# EAGLE board HEX3_leg_board_PCB_v3.2 (EAGLE 9.7.0)
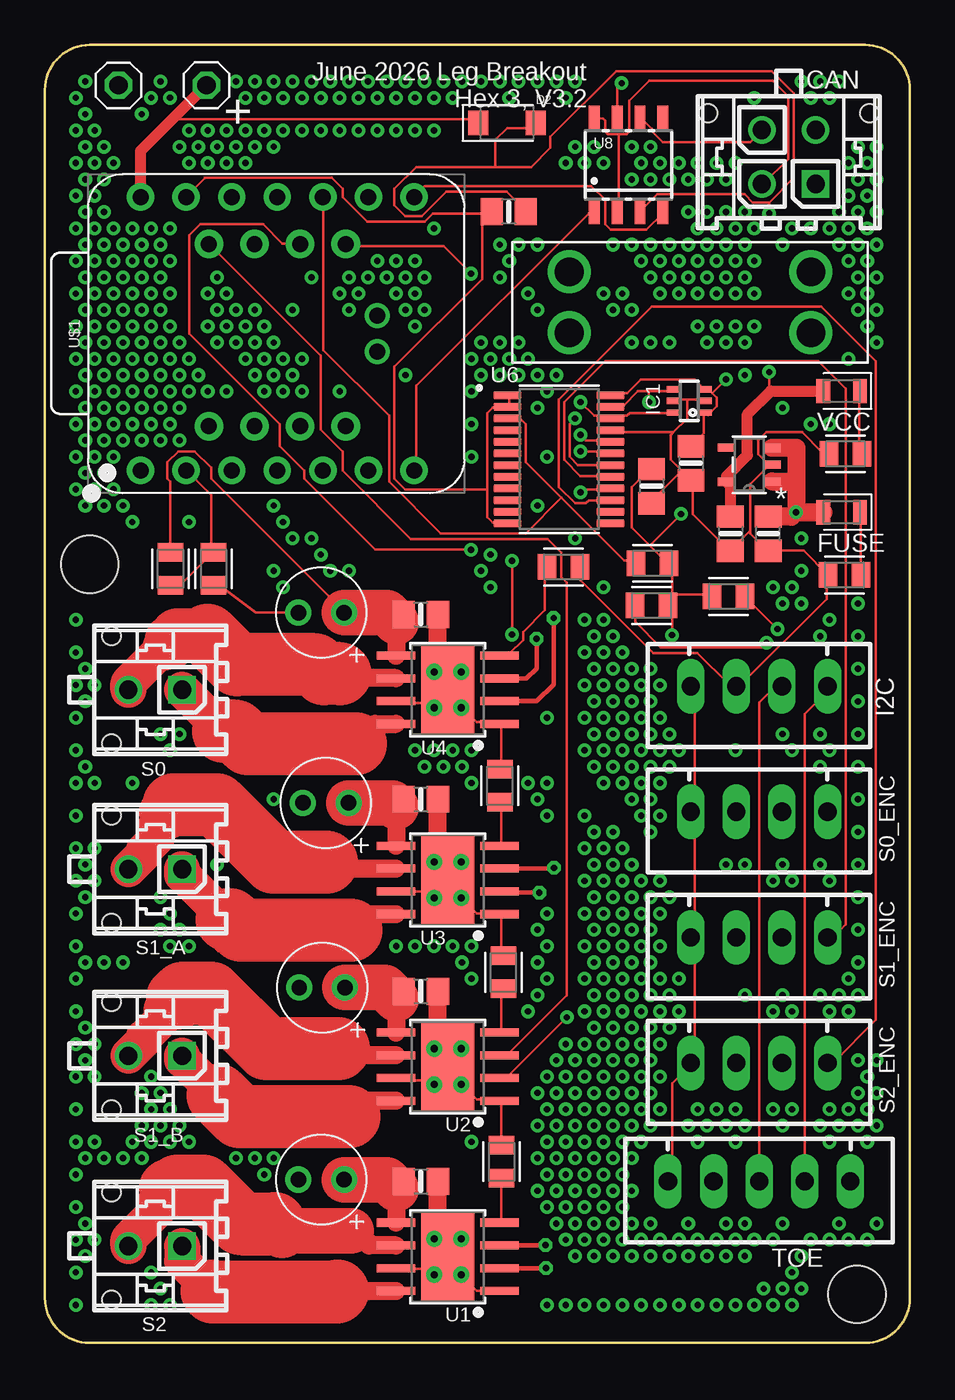
[diagram p0: board, top side]
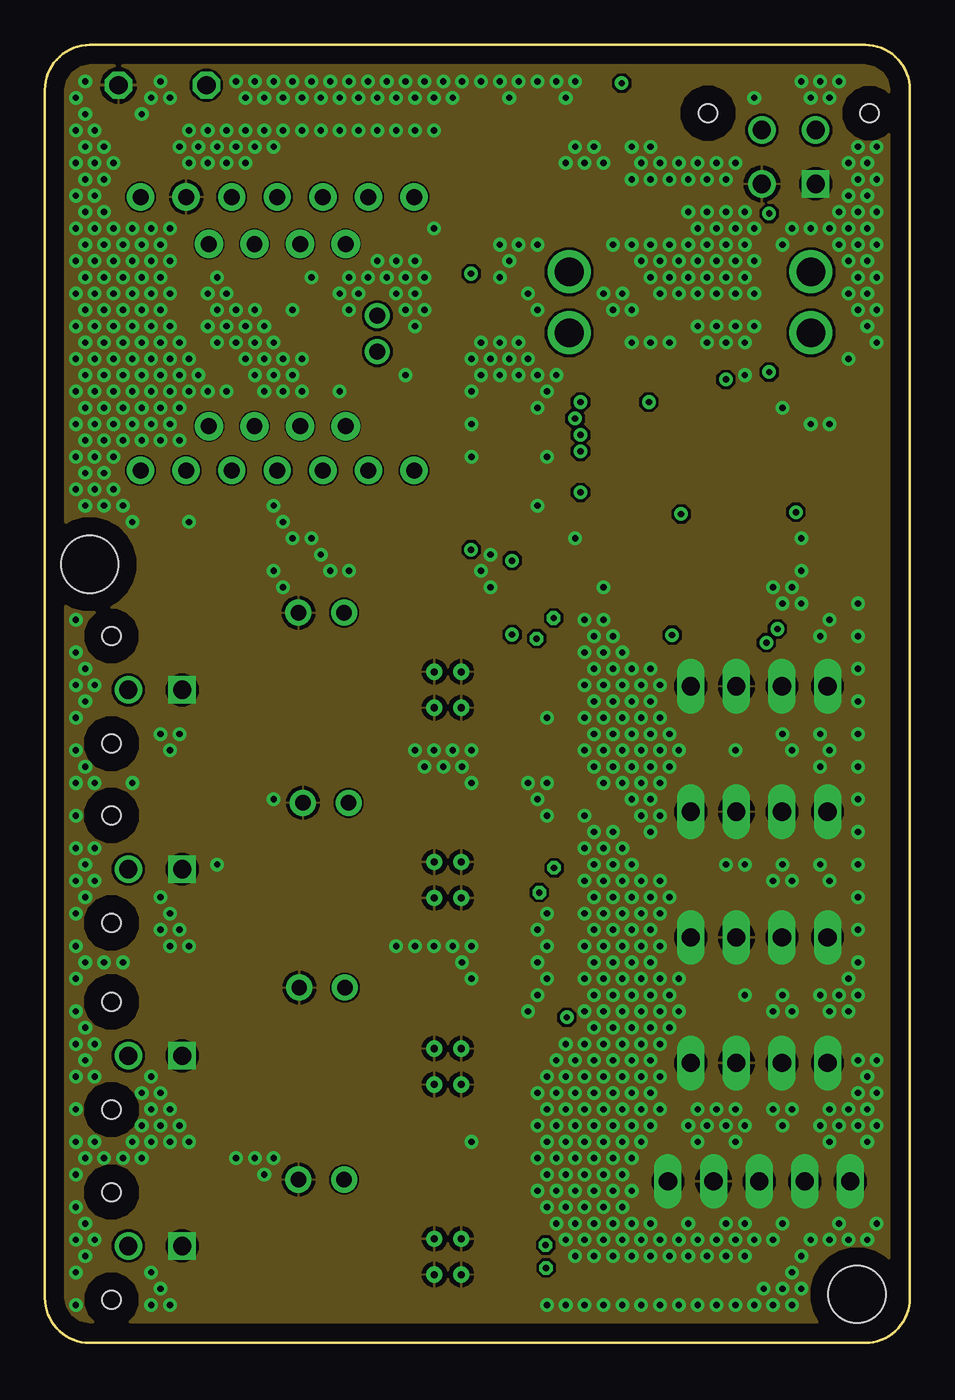
[diagram p1: board, inner layer Route2]
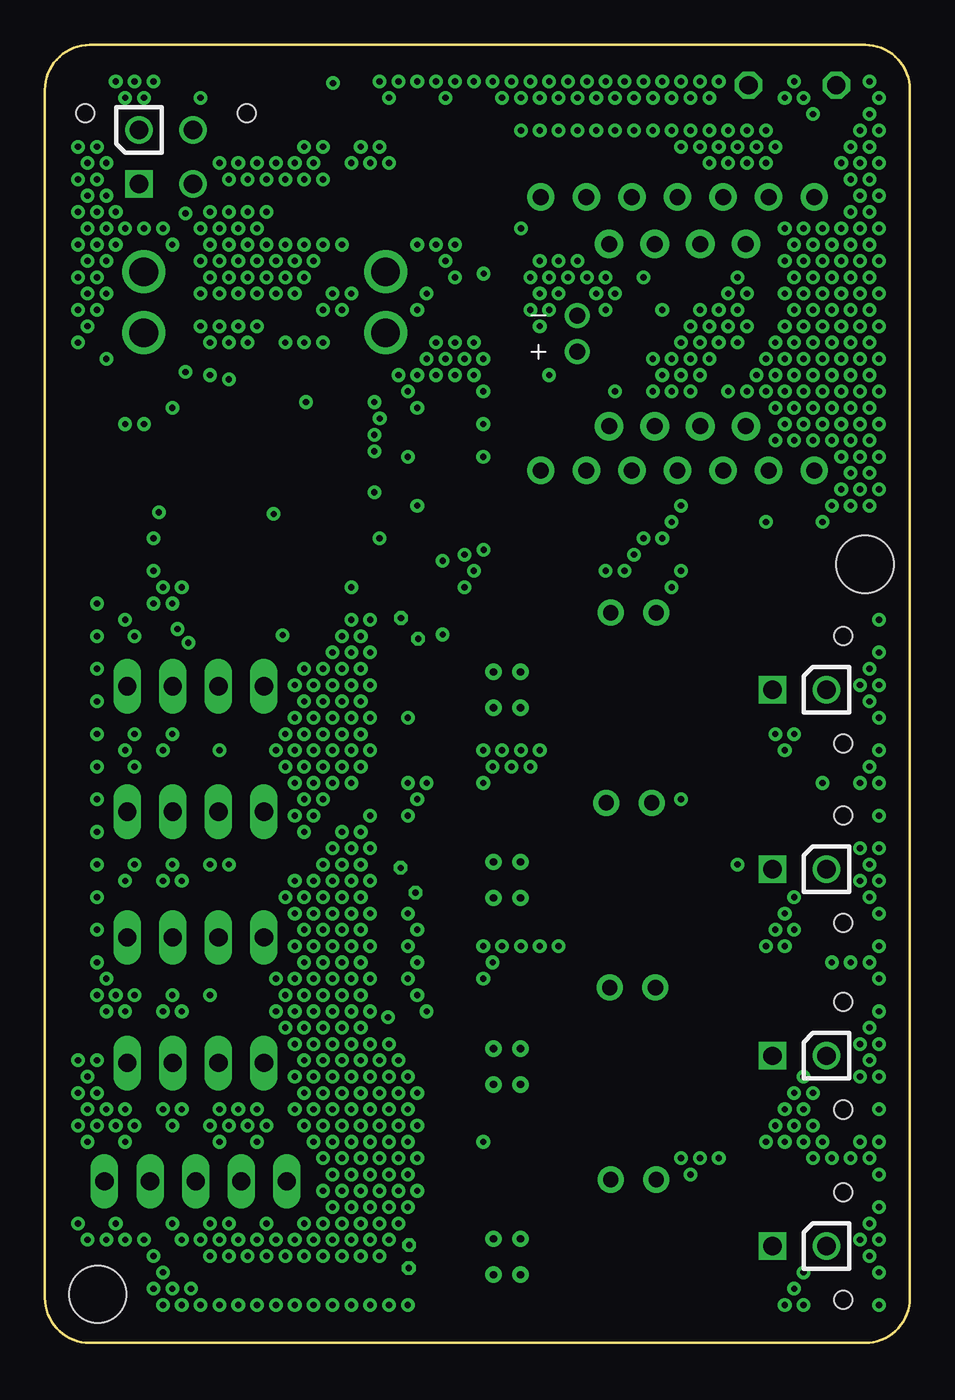
[diagram p2: board, bottom side, seen from below]

Size 48.2 x 72.35 mm. Coordinates in mm from the lower left corner, seen from the top.
Outline: 0,69.85 0,2.5 arc90 2.5,0 45.7,0 arc90 48.2,2.5 48.2,69.85 arc90 45.7,72.35 2.5,72.35 arc90 0,69.85
Copper layers (1+2*63+64): Top / Route2 / layer 63 / layer 64
Stack-up 4 Layer Stack: Top SilkScreen Epoxy Ink / Top SolderMask SR:Green 0.0254mm Dk 4.3 / Top Surface Finish Lead-Free 0.02mm / Top CuFoil:007 0.035mm / Dielectric-1 Prepreg:001 0.064mm / Dielectric-2 Prepreg:001 0.064mm / Route2 CuFoil:007 0.035mm / Dielectric-3 Core:066 0.711mm / Route63 CuFoil:007 0.035mm / Dielectric-4 Prepreg:001 0.064mm / Dielectric-5 Prepreg:001 0.064mm / Bottom CuFoil:007 0.035mm / Bottom Surface Finish Lead-Free 0.02mm / Bottom SolderMask SR:Green 0.0254mm Dk 4.3 / Bottom SilkScreen Epoxy Ink
Design rules: minimum copper width 6mil, minimum drill size 0.35mm, copper clearance wire_polygon to wire_polygon 6mil, copper clearance wire_polygon to pad_smd 6mil, copper clearance wire_polygon to via 6mil, copper clearance pad_smd to pad_smd 6mil, copper clearance pad_smd to via 0.5mm, copper clearance via to via 0.15mm, copper clearance smd to pad (same net) 6mil, copper clearance smd to via (same net) 6mil, copper clearance smd to smd (same net) 6mil, dimension clearance 40mil, via restrict clearance 0mil, restrict clearance 0mil, drill distance 6mil, keepout clearance 0mil
Holes 3.2 mm at 45.25,2.7 2.5,43.4

## Footprints (pad centres in the part's own frame; a part is rotated, then mirrored left to right if it is on the bottom)
0805-NO = smd 1.24 x 1.5: 1 -0.95,0; 2 0.95,0
CAPPRD254W65D500H1150B = drill 0.85 pad 1.45: 1 -1.27,0; 2 1.27,0
1X01 = drill 1.016 octagon: 1 0,0
SODFL3718X115 = smd 1.115 x 1.361: 1 -1.6,0; 2 1.6,0
JST-XH-04-PACKAGE-LONG-PAD = drill 1.016 long: 1 -3.81,0; 2 -1.27,0; 3 1.27,0; 4 3.81,0
FUSE_3557-2 = drill 1.6: 1_1 -6.735,1.7; 1_2 -6.735,-1.7; 2_1 6.735,1.7; 2_2 6.735,-1.7
LEDC2012X110N_FLAT-R = smd 0.762 x 1.362: A 1.025,0; C -1.025,0
SC70-6L = smd 0.35 x 0.8: 1 -0.65,-0.85; 2 0,-0.85; 3 0.65,-0.85; 4 0.65,0.85; 5 0,0.85; 6 -0.65,0.85
43045-0412 = drill 1.02 square: P$1 1.5,0 | drill 1.02: P$2 -1.5,0; P$3 1.5,3; P$4 -1.5,3 | hole 1.02: 4.5,3.94; -4.5,3.94
RESC2012X65 = smd 1.031 x 1.42: 1 -0.919,0; 2 0.919,0
43045-0212 = drill 1.02 square: P$1 0,0 | drill 1.02: P$2 0,3 | hole 1.02: 3,3.94; -3,3.94
JST-XH-05-PACKAGE-LONG-PAD = drill 1.016 long: 1 -5.08,0; 2 -2.54,0; 3 0,0; 4 2.54,0; 5 5.08,0
HSOP8 = smd 0.45 x 2.15: 1 -1.905,-2.875; 2 -0.635,-2.875; 3 0.635,-2.875; 4 1.905,-2.875; 5 1.905,2.875; 6 0.635,2.875; 7 -0.635,2.875; 8 -1.905,2.875 | smd 4.9 x 2.95: GND 0,0 | drill 0.4: P$1 -1,0.75; P$2 -1,-0.75; P$3 1,-0.75; P$4 1,0.75
TSOT23-5_ONS = smd 0.953 x 0.457: 1 -1.276,0.94; 2 -1.276,0; 3 -1.276,-0.94; 4 1.276,-0.953; 5 1.276,0.953
SOP65P640X120-24N = smd 1.57 x 0.41: 1 -2.87,3.575; 2 -2.87,2.925; 3 -2.87,2.275; 4 -2.87,1.625; 5 -2.87,0.975; 6 -2.87,0.325; 7 -2.87,-0.325; 8 -2.87,-0.975; 9 -2.87,-1.625; 10 -2.87,-2.275; 11 -2.87,-2.925; 12 -2.87,-3.575; 13 2.87,-3.575; 14 2.87,-2.925; 15 2.87,-2.275; 16 2.87,-1.625; 17 2.87,-0.975; 18 2.87,-0.325; 19 2.87,0.325; 20 2.87,0.975; 21 2.87,1.625; 22 2.87,2.275; 23 2.87,2.925; 24 2.87,3.575
SOT96-1 = smd 0.6 x 1.3: 1 -1.905,-2.65; 2 -0.635,-2.65; 3 0.635,-2.65; 4 1.905,-2.65; 5 1.905,2.65; 6 0.635,2.65; 7 -0.635,2.65; 8 -1.905,2.65
XIAO-RP2350-DIP = drill 0.889 pad 1.524: 1_2 7.62,7.62; 2_2 5.08,7.62; 3_2 2.54,7.62; 4_2 0,7.62; 5_2 -2.54,7.62; 6_2 -5.08,7.62; 7_2 -7.62,7.62; 8_1 -7.62,-7.62; 9_1 -5.08,-7.62; 10_1 -2.54,-7.62; 11_1 0,-7.62; 12_1 2.54,-7.62; 13_1 5.08,-7.62; 14_1 7.62,-7.62 | drill 0.889 pad 1.6: 15_1 3.81,-5.001; 16_1 1.27,-5.001; 17_1 -1.27,-5.001; 18_1 -3.81,-5.001; 19_3 -3.81,5.159; 20_3 -1.27,5.159; 21_3 1.27,5.159; 22_3 3.81,5.159 | drill 0.889 pad 1.1: 23_3 -5.575,1; 24_3 -5.575,-1
LEDC2012X110N_FLAT-B = smd 0.762 x 1.362: A 1.025,0; C -1.025,0

## Placement (x,y rotation side)
C1  0.1uF/50V  [0805-NO]  20.95,19.6 0 top
C2  22uF/50V  [CAPPRD254W65D500H1150B]  15.45,19.8 180 top
C3  0.1uF/50V  [0805-NO]  20.95,30.3 0 top
C4  22uF/50V  [CAPPRD254W65D500H1150B]  15.65,30.1 180 top
C5  0.1uF/50V  [0805-NO]  20.95,40.6 0 top
C6  22uF/50V  [CAPPRD254W65D500H1150B]  15.4,40.7 180 top
C7  0.1uF/50V  [0805-NO]  20.95,9 0 top
C9  1uF  [0805-NO]  38.2,45.1 270 top
C10  1uF  [0805-NO]  40.3,45.1 90 top
C12  10uF  [0805-NO]  33.8,47.75 270 top
C13  0.1uF  [0805-NO]  25.85,63.05 180 top
C14  0.01uF  [0805-NO]  36,49.03 270 top
C15  22uF/50V  [CAPPRD254W65D500H1150B]  15.4,9.1 180 top
CAP_5V_DIODE  PINHD-1X1  [1X01]  9,70.1 0 top
CAP_GND  PINHD-1X1  [1X01]  4.1,70.1 0 top
D2  ZENER  [SODFL3718X115]  25.75,68 0 top
EXTRA  JST-XH-04-PIN-LONG-PAD  [JST-XH-04-PACKAGE-LONG-PAD]  39.8,36.6 180 top
F1  3557-2  [FUSE_3557-2]  35.95,58 0 top
FUSE  LED_RED  [LEDC2012X110N_FLAT-R]  44.4,46.3 180 top
IC1  LTC4311_SC70  [SC70-6L]  35.9,52.5 90 top
IN  [43045-0412]  41.45,64.6 0 top
R1  1.5K  [RESC2012X65]  44.55,42.8 180 top
R2  470  [RESC2012X65]  44.6,49.55 180 top
R3  62K  [RESC2012X65]  7,43.15 90 top
R4  10K  [RESC2012X65]  9.4,43.15 90 top
R5  10K  [RESC2012X65]  33.85,43.45 180 top
R6  10K  [RESC2012X65]  38.1,41.6 0 top
R7  22K  [RESC2012X65]  25.45,10.1 270 top
R8  22K  [RESC2012X65]  25.35,31.05 270 top
R9  22K  [RESC2012X65]  28.9,43.25 180 top
R10  22K  [RESC2012X65]  25.55,20.65 270 top
R11  10K  [RESC2012X65]  33.8,41.1 180 top
S0_ENC  JST-XH-04-PIN-LONG-PAD  [JST-XH-04-PACKAGE-LONG-PAD]  39.8,29.6 180 top
S1  [43045-0212]  7.65,5.4 90 top
S1_ENC  JST-XH-04-PIN-LONG-PAD  [JST-XH-04-PACKAGE-LONG-PAD]  39.8,22.6 180 top
S2_A  [43045-0212]  7.65,16 90 top
S2_B  [43045-0212]  7.65,26.4 90 top
S2_ENC  JST-XH-04-PIN-LONG-PAD  [JST-XH-04-PACKAGE-LONG-PAD]  39.8,15.6 180 top
S3  [43045-0212]  7.65,36.4 90 top
TOE  JST-XH-05-PIN-LONG-PAD  [JST-XH-05-PACKAGE-LONG-PAD]  39.8,9 180 top
U1  DRV8871  [HSOP8]  22.45,4.8 90 top
U2  DRV8871  [HSOP8]  22.45,15.4 90 top
U3  DRV8871  [HSOP8]  22.45,25.8 90 top
U4  DRV8871  [HSOP8]  22.45,36.4 90 top
U5  NCP718ASN500T1GTSOT23-5_ONS  [TSOT23-5_ONS]  39.25,48.95 180 top
U6  TCA9548APWR  [SOP65P640X120-24N]  28.65,49.25 0 top
U8  TJA1050  [SOT96-1]  32.52,65.66 0 top
U$1  XIAO-RP2350-DIPXIAO-RP2350-DIP  [XIAO-RP2350-DIP]  12.95,56.25 180 top
VCC  LED_BLUE  [LEDC2012X110N_FLAT-B]  44.39,53.05 180 top

## Library data of the parts
C1 C3 C5 C7 C9 C10 C12-C14 IC1 U1-U4 = microbuilder
C2 C4 C6 C15 = Tinkercad
CAP_5V_DIODE CAP_GND = Connector; CATEGORY: Headers; DESCRIPTION: Header-Straight-1 Position; PACKAGE_TYPE: THT; PITCH: 0.100" (2.54mm); SUBCATEGORY: Headers-Male Pins; TYPE: Board to Board or Cable-Unshrouded-Through Hole-Straight
D2 = Tinkercad; CATEGORY: Diode; SUB-CATEGORY: Zener
EXTRA S0_ENC S1_ENC S2_ENC TOE = Rembrandt Electronics - JST XH Connectors v1-0
F1 = Mini Blade Fuse 3557-2; AVAILABILITY: In Stock; CHECK_PRICES: https://www.snapeda.com/parts/3557-2/Keystone/view-part/?ref=eda; DESCRIPTION: THM 2 in 1 Auto Blade Holder; MF: Keystone Electronics; MP: 3557-2; PACKAGE: Nonstandard Keystone; PRICE: None; SNAPEDA_LINK: https://www.snapeda.com/parts/3557-2/Keystone/view-part/?ref=snap
FUSE = LED; CATEGORY: LED; COLOR: RED; DESCRIPTION: CHIP LED FLAT; SUB-CATEGORY: CHIP; TYPE: FLAT_TOP
IN S1 S2_A S2_B S3 = Molex Connectors
R1-R11 = Resistor; CATEGORY: Resistors; DESCRIPTION: Chip Resistor 2.00 X 1.25 X 0.65 mm body 0805(2012-METRIC) Package; PACKAGE_SIZE: 0805; PACKAGE_TYPE: SMD
U5 = NCP718ASN500T1G Voltage Regulator; COPYRIGHT: Copyright (C) 2025 Ultra Librarian. All rights reserved.; MANUFACTURER_NAME: onsemi; MANUFACTURER_PART_NUMBER: NCP718ASN500T1G
U6 = TCA9548APWR I2C MUX; AVAILABILITY: In Stock; CHECK_PRICES: https://www.snapeda.com/parts/TCA9548APWR/Texas+Instruments/view-part/?ref=eda; DESCRIPTION: 8-channel 1.65- to 5.5-V I2C/SMBus switch with reset & voltage translation; MF: Texas Instruments; MP: TCA9548APWR; PACKAGE: TSSOP-24 Texas Instruments; PRICE: None; SNAPEDA_LINK: https://www.snapeda.com/parts/TCA9548APWR/Texas+Instruments/view-part/?ref=snap
U8 = TJA1050; AVAILABILITY: In Stock; CHECK_PRICES: https://www.snapeda.com/parts/TJA1050/NXP+Semiconductors/view-part/?ref=eda; DESCRIPTION: CAN 1MBd Silent 5V Automotive 8-Pin SO T/R; MF: NXP Semiconductors; MP: TJA1050; PACKAGE: None; PRICE: None; SNAPEDA_LINK: https://www.snapeda.com/parts/TJA1050/NXP+Semiconductors/view-part/?ref=snap
U$1 = XIAO-RP2350-DIP
VCC = LED; CATEGORY: LED; COLOR: BLUE; DESCRIPTION: CHIP LED FLAT; SUB-CATEGORY: CHIP; TYPE: FLAT_TOP

## Nets
3.3V: C12.1 C14.1 EXTRA.4 IC1.1 IC1.3 R5.1 R6.1 R11.1 S0_ENC.4 S1_ENC.4 S2_ENC.4 TOE.5 U6.24 U$1.12_1
5V: C9.1 C13.1 D2.2 U5.5 U8.3 VCC.A
5V_DIODE: CAP_5V_DIODE.1 D2.1 U$1.14_1
24V: F1.1_1 F1.1_2 IN.P$1
24V_FUSE: C1.1 C2.1 C3.1 C4.1 C5.1 C6.1 C7.1 C10.2 C15.1 F1.2_1 F1.2_2 FUSE.A R3.2 U1.5 U2.5 U3.5 U4.5 U5.1 U5.3
CAN_RX: U8.4 U$1.8_1
CAN_TX: U8.1 U$1.7_2
CANH: IN.P$3 U8.7
CANL: IN.P$4 U8.6
GND: C1.2 C2.2 C3.2 C4.2 C5.2 C6.2 C7.2 C9.2 C10.1 C12.2 C13.2 C14.2 C15.2 CAP_GND.1 EXTRA.3 IC1.2 IC1.5 IN.P$2 R1.2 R2.2 R4.1 R7.1 R8.1 R9.1 R10.1 S0_ENC.3 S1_ENC.3 S2_ENC.3 TOE.4 U1.1 U1.7 U1.GND U1.P$1 U1.P$2 U1.P$3 U1.P$4 U2.1 U2.7 U2.GND U2.P$1 U2.P$2 U2.P$3 U2.P$4 U3.1 U3.7 U3.GND U3.P$1 U3.P$2 U3.P$3 U3.P$4 U4.1 U4.7 U4.GND U4.P$1 U4.P$2 U4.P$3 U4.P$4 U5.2 U6.1 U6.2 U6.12 U6.21 U8.2 U8.8 U$1.13_1
MUX_RESET: R5.2 U6.3 U$1.10_1
MUX_SCL: EXTRA.2 IC1.6 R11.2 TOE.3 U6.22 U$1.17_1
MUX_SDA: EXTRA.1 IC1.4 R6.2 TOE.2 U6.23 U$1.18_1
N$1: R7.2 U1.4
N$2: R10.2 U2.4
N$3: R8.2 U3.4
N$4: R9.2 U4.4
N$6: FUSE.C R1.1
N$8: R2.1 VCC.C
N$9: R3.1 R4.2 U$1.2_2
OUT1: S1.P$2 U1.6
OUT2: S1.P$1 U1.8
OUT3: S2_A.P$1 U2.8
OUT4: S2_A.P$2 U2.6
OUT5: S2_B.P$1 U3.8
OUT6: S2_B.P$2 U3.6
OUT7: S3.P$1 U4.8
OUT8: S3.P$2 U4.6
S0_A: U4.3 U$1.9_1
S0_B: U4.2 U$1.11_1
S0_SCL: S0_ENC.2 U6.20
S0_SDA: S0_ENC.1 U6.19
S1_SCL: S1_ENC.2 U6.18
S1_SDA: S1_ENC.1 U6.17
S1A_A: U2.3 U$1.15_1
S1A_B: U2.2 U$1.16_1
S1B_A: U3.3 U$1.19_3
S1B_B: U3.2 U$1.20_3
S2_A: U1.3 U$1.21_3
S2_B: U1.2 U$1.22_3
S2_SCL: S2_ENC.2 U6.16
S2_SDA: S2_ENC.1 U6.15
TOE_GPIO: TOE.1 U$1.1_2

## Tracks (layer width: path | path; a pad name or v marks a point on that pad's centre or on a via)
3.3V  (via drill 0.35 layers 1-64)
  Top 0.152: C14.1 36.2,50.2 36.7,50.7 36.7,51.7 IC1.1 36.95,51.7 37.45,52.2 37.45,52.7 37.2,52.95 | 37.2,52.95 36.95,53.2 IC1.3 36.2,53.7 33.2,53.7 32.45,52.95 31.7,52.95 U6.24 | 37.2,52.95 v37.95,53.7 | TOE.5 34.95,9.2 34.95,14.45 35.95,15.45 S2_ENC.4 36.2,15.7 36.2,22.45 S1_ENC.4 36.2,22.7 36.2,29.45 S0_ENC.4 36.2,29.7 36.2,36.45 EXTRA.4 | 34.95,41.7 34.95,43.45 R5.1 34.7,43.45 33.7,44.45 | 34.95,41.7 34.95,41.2 R11.1 | 34.95,41.7 36.95,41.7 R6.1 | 34.95,41.7 R11.1 | 33.7,44.45 32.7,45.45 32.7,47.7 33.7,48.7 C12.1 | v34.95,39.45 34.95,40.95 R11.1 | 33.7,44.45 v35.45,46.2
  Bottom 0.152: U$1.12_1 10.45,63.95 11.2,63.95 13.45,66.2 25.45,66.2 v37.95,53.7 37.95,48.7 v35.45,46.2 | v34.95,39.45 34.95,37.7 35.95,36.7 EXTRA.4
5V  (via drill 0.35 layers 1-64)
  Top 0.152: 40.36,63.56 39.45,63.56 38.99,64.02 34.11,64.02 33.2,63.1 U8.3 | 40.36,63.56 41.73,64.93 41.73,69.66 40.51,70.88 31.83,70.88 28.17,67.22 28.17,66.61 27.1,65.54 25.1,65.54 | 25.1,65.54 20.7,65.54 19.48,64.32 19.48,63.41 20.09,62.8 21,62.8 22.38,64.17 25.73,64.17 26.8,63.1 C13.1 | v40.36,54.11 40.36,53.35 40.44,53.05 | 40.36,63.56 v40.36,62.95 | D2.2 26.95,67.7 25.75,67.7 25.1,67.05 25.1,65.54
  Top 0.61: C9.1 38.2,47.77 U5.5 37.97,48.3 39.15,49.47 39.15,51.76 40.44,53.05 VCC.A
  Bottom 0.152: v40.36,62.95 v40.36,54.11
5V_DIODE
  Top 0.152: D2.1 23.95,68.2 7.45,68.2 7.27,68.38
  Top 0.61: CAP_5V_DIODE.1 7.27,68.38 5.33,66.42 U$1.14_1
24V
  pour Route63: 21.9,72 21.9,57.6 25.4,54.1 32.2,54.1 40.9,62.8 46.7,62.8 46.7,72
24V_FUSE  (via drill 0.35 layers 1-64)
  Top 0.152: R3.2 6.98,44.21 6.98,48.02 6.83,48.17 6.83,49.08 7.44,49.69 8.36,49.69 9.27,48.78 9.27,48.17 15.82,41.62 C6.1
  Top 1.016: v41.85,46.3 41.88,46.33 41.88,47.83 | v41.85,46.3 41.6,46.05 C10.2 | U4.5 19.57,40.18 C5.1 | U3.5 19.57,29.87 C3.1 | U2.5 19.57,19.18 C1.1 | U1.5 19.57,8.57 C7.1 | U5.1 41.69,48.01 41.88,47.83 | U5.3 41.88,49.89 41.88,47.83 | v41.85,46.3 FUSE.A
  Top 2.54: C6.1 19.05,40.7 19.57,40.18 | C15.1 19.05,9.1 19.57,8.57 | C2.1 18.95,19.8 19.57,19.18 | C4.1 19.35,30.1 19.57,29.87
  pour Route63: -3.65,-2.85 51.3,-2.85 51.75,-2.4 51.75,58.95 48.75,61.95 41.55,61.95 31,51.4 -3.3,51.4 -3.9,50.8 -3.9,-2.6
CAN_RX
  Top 0.152: U8.4 34.42,62.95 33.5,62.04 31.52,62.04 31.22,62.34 31.22,63.71 30.45,64.48 21.16,64.48 20.7,64.02 U$1.8_1
CAN_TX
  Top 0.152: U8.1 30.61,62.95 30.3,62.95 20.7,53.35 20.7,48.78 U$1.7_2
CANH  (via drill 0.35 layers 1-64)
  Top 0.152: v32.14,70.22 31.89,69.96 U8.7
  Bottom 0.152: IN.P$3 40.34,70.22 v32.14,70.22
CANL
  Top 0.152: U8.6 33.2,68.28 33.81,67.68 33.81,67.52 34.42,66.91 39.29,66.91 39.9,67.52 IN.P$4
GND  (via drill 0.35 layers 1-64)
  Top 0.152: 21.61,3.82 21.31,4.12 19.63,4.12 U1.7 | 23.29,3.67 U1.GND 21.61,3.82 | 21.61,24.85 21.31,25.16 19.63,25.16 U3.7 | U2.7 19.63,14.64 21.46,14.64 21.61,14.49 U2.GND | U2.GND 23.29,14.34 24.05,13.57 25.27,13.57 U2.1 25.43,13.42 25.43,11.14 R7.1 | 21.61,35.52 21.46,35.67 19.63,35.67 U4.7 | R4.1 9.75,42.22 11.74,40.7 C6.2 | 21.61,35.52 U4.GND 23.29,35.37 24.05,34.61 25.27,34.61 U4.1 25.43,34.45 25.43,32.01 R8.1 | 21.61,35.52 U4.P$1 | U2.GND 23.29,16.47 U2.P$3 | 21.61,24.85 U3.GND 23.29,24.7 24.05,23.94 25.27,23.94 U3.1 25.43,23.78 25.43,21.65 R10.1 | 21.61,24.85 U3.P$1 | 21.61,3.82 U1.P$1 | U8.8 31.12,68.23 31.22,68.13 31.22,67.53 31.37,67.37 31.98,67.37 | IN.P$2 40.05,64.63 41.42,65.99 41.42,69.48 40.56,70.34 33.67,70.34 32.57,69.24 32.57,67.51 32.42,67.37 31.98,67.37 | 23.29,3.67 24.05,2.91 25.27,2.91 U1.1 | 23.29,3.67 U1.P$2 | 31.98,67.37 31.98,63.1 U8.2 | 35.79,52.59 36.7,52.59 IC1.2 | 35.79,52.59 35.18,52.59 IC1.5 | 35.79,52.59 35.79,51.52 35.03,50.76 | 35.03,50.76 34.87,50.61 34.87,49.23 35.48,48.63 | 35.48,48.63 35.94,48.17 C14.2 | 35.48,48.63 33.81,46.95 C12.2 | 35.48,48.63 C14.2 | 35.03,50.76 31.52,50.76 U6.21 | 40.36,48.93 40.51,48.93 U5.2 40.36,48.93 | 40.36,48.93 39.29,47.86 39.29,45.27 | 39.29,45.27 39.29,45.12 40.21,44.21 C10.1 42.28,44.15 R1.2 43.56,42.68 43.56,41.46 38.7,36.61 EXTRA.3 38.12,36.69 36.35,38.46 33.91,38.46 29.84,42.53 29.84,43.23 | 40.36,48.93 39.75,49.54 39.75,50.3 40.21,50.76 42.19,50.76 43.26,49.69 43.56,49.69 R2.2 | 39.29,45.27 38.23,44.21 C9.2 38.07,44.21 36.09,46.19 36.09,48.02 C14.2 | 24.66,47.56 24.66,51.83 24.97,52.13 25.73,52.13 U6.2 25.88,52.28 25.88,52.74 U6.1
  Top 0.152: 24.66,47.56 24.66,46.04 24.97,45.73 25.73,45.73 U6.12 | 24.36,62.95 21.61,62.95 21.16,62.49 17.96,62.49 16.59,63.87 16.59,64.32 15.98,64.93 8.92,64.93 8.92,64.92 U$1.13_1 | 24.36,62.95 24.81,62.95 C13.2 24.36,62.95 | 24.66,47.56 20.09,47.56 19.48,48.17 19.48,54.42 24.36,59.29 24.36,62.95
  Top 0.254: R9.1 29.84,43.23
  Top 1.016: C7.2 21.9,6 U1.P$4 | C1.2 21.9,16.6 U2.P$4 | C3.2 21.9,27 U3.P$4 | C5.2 21.9,37.6 U4.P$4
  Bottom 0.61: CAP_GND.1 4.1,67.64 U$1.13_1
  other vias: 39.53,69.4 5.92,69.4 9.07,67.58 45.83,65.76 5.4,57.58 36.38,56.67 2.78,56.67 14.32,54.85 11.7,53.94 23.77,49.39 1.72,47.57 4.88,45.76 30.6,13.93 27.97,13.02 33.75,12.11 30.07,2.11 3.3,10.29 5.92,11.2 31.65,23.02 34.28,23.93 31.12,25.75 43.73,33.03 32.18,34.84 16.95,70.31 22.72,69.4 29.02,65.76 34.8,64.85 37.95,63.03 43.73,62.12 41.1,61.21 16.43,58.49 25.35,55.76 28.5,53.94 3.83,51.21 24.82,43.94 23.77,20.3 35.33,18.48 1.72,18.48 32.7,17.57 2.25,15.75 44.78,13.02 41.1,3.02 37.95,4.84 32.18,5.75 29.02,7.57 20.62,22.11 45.3,24.84 2.78,27.57 33.23,29.39 27.45,30.3 42.15,70.31 14.32,69.4 37.43,65.76 3.83,65.76 19.05,59.4 13.8,57.58 11.17,56.67 33.75,55.76 5.92,54.85 3.3,53.94 13.27,45.76 32.18,20.3 26.93,18.48 30.07,16.66 29.55,4.84 31.65,8.47 11.7,10.29 6.45,23.02 30.6,28.48 4.88,31.21 32.7,32.12 1.72,33.03 35.33,33.03 31.12,40.3 25.35,70.31 17.47,67.58 46.35,63.03 1.72,62.12 32.7,61.21 38.48,60.3 4.88,60.3 35.85,59.4 2.25,59.4 20.1,53.94 9.07,53.03 6.45,52.12 43.73,18.48 33.23,14.84 5.4,13.93 36.38,13.02 31.12,11.2 38.48,2.11 1.72,3.93 40.58,5.75 28.5,10.29 31.65,37.57 45.3,39.39 42.15,41.21 1.72,69.4 13.27,67.58 10.65,66.67 8.02,65.76 25.88,60.3 37.43,58.49 3.83,58.49 46.35,55.76 12.75,55.76 7.5,53.94 27.97,49.39 3.3,46.67 44.78,20.3 29.02,14.84 37.95,12.11 32.7,10.29 1.72,11.2 33.23,22.11 45.3,32.12 33.75,33.93 30.07,38.48 40.58,42.12 21.15,70.31 18.52,69.4 2.78,63.94 45.3,61.21 6.45,59.4 20.62,58.49 26.93,54.85 24.3,53.94 4.88,53.03 2.25,52.12 14.85,44.85 30.6,21.2 27.97,20.3 34.28,16.66 31.65,15.75 45.83,14.84 40.58,13.02 6.98,13.02 33.75,4.84 2.78,5.75 36.38,5.75 39,6.66 27.45,8.47 30.07,9.38 43.73,25.75 32.18,27.57 31.12,33.03 1.72,40.3 12.75,70.31 43.73,69.4 2.25,66.67 33.23,65.76 14.85,59.4 45.83,58.49 9.6,57.58 6.98,56.67 37.95,55.76 4.35,55.76 1.72,54.85 27.45,52.12 33.75,19.39 31.12,18.48 46.35,12.11 43.73,11.2 30.6,6.66 8.02,22.11 34.28,31.21 29.55,70.31 21.68,67.58 44.78,63.94 39.53,62.12 5.92,62.12 36.9,61.21 3.3,61.21 34.28,60.3 13.27,53.03 5.4,50.3 2.78,49.39 32.18,13.02 29.55,12.11 34.28,2.11 5.92,3.93 42.15,4.84 44.78,5.75 27.45,23.02 30.07,23.93 32.7,24.84 1.72,25.75 37.95,26.66 22.72,33.03 27.97,34.84 30.6,35.75 33.23,36.66 2.25,37.57 43.73,40.3 12.22,67.58 9.07,65.76 38.48,58.49 4.88,58.49 31.65,57.58 1.72,56.67 11.7,55.76 6.98,54.85 8.55,53.94 2.78,47.57 4.35,46.67 41.1,19.39 30.07,14.84 36.9,12.11 32.18,11.2 12.22,9.38 34.28,22.11 32.7,33.93 2.25,35.75 30.6,37.57 20.1,70.31 15.38,69.4 30.6,66.67 35.85,64.85 2.25,64.85 44.78,62.12 46.35,61.21 9.6,59.4 23.77,54.85 25.35,53.94 3.83,53.03 5.4,52.12 27.45,21.2 31.12,20.3 33.23,16.66 6.45,13.93 43.73,13.02 41.62,2.11 32.7,4.84 39.53,5.75 2.25,6.66 35.85,6.66 30.6,8.47 29.02,9.38 40.58,25.75 45.3,26.66 1.72,27.57 31.65,28.48 11.7,70.31 6.98,69.4 34.28,65.76 18,59.4 6.45,57.58 10.12,56.67 36.9,55.76 3.3,55.76 12.75,46.67 8.02,45.76 2.25,21.2 32.7,19.39 45.3,12.11 31.12,5.75 6.98,11.2 30.07,29.39 33.23,31.21 7.5,33.93 41.1,33.93 28.5,70.31 20.62,67.58 36.38,62.12 2.78,62.12 37.95,61.21 4.35,61.21 33.23,60.3 34.8,59.4 12.22,53.03 42.68,51.21 2.25,50.3 44.78,18.48 31.65,13.93 1.72,13.02 28.5,12.11 33.23,2.11 44.25,6.66 23.77,11.2 30.6,23.02 33.75,24.84 32.18,25.75 21.15,32.12 31.12,34.84 34.28,36.66 45.3,41.21 15.9,70.31 19.57,69.4 30.07,65.76 1.72,63.94 36.9,63.03 3.3,63.03 6.98,62.12 45.83,60.3 17.47,58.49 24.3,55.76 4.88,51.21 6.45,50.3 23.25,21.2 32.18,18.48 33.75,17.57 42.15,3.02 36.9,4.84 1.72,5.75 35.33,5.75 31.65,6.66 30.07,7.57 21.68,22.11 41.1,26.66 34.28,29.39 23.77,33.03 31.12,42.12 8.02,67.58 9.6,66.67 25.35,61.21 34.28,58.49 2.25,57.58 39.53,56.67 5.92,56.67 7.5,55.76 44.78,54.85 11.17,54.85 12.75,53.94 16.43,53.03 45.3,19.39 27.45,13.93 31.12,13.02 32.7,12.11 36.38,11.2 29.02,2.11 4.35,10.29 2.78,11.2 33.23,23.93 6.98,33.03 1.72,34.84 31.65,35.75 30.07,36.66 11.17,69.4 38.48,65.76 20.62,60.3 9.07,58.49 10.65,57.58 32.7,55.76 2.78,54.85 4.35,53.94 13.8,44.85 31.65,21.2 35.33,20.3 1.72,20.3 29.02,16.66 30.6,15.75 41.1,12.11 7.5,12.11 12.75,10.29 31.12,27.57 33.75,32.12 32.18,33.03 45.3,33.93 24.3,70.31 16.43,67.58 45.3,63.03 33.75,61.21 37.43,60.3 3.83,60.3 39,59.4 5.4,59.4 27.45,57.58 8.02,53.03 1.72,49.39 3.3,48.48 40.58,18.48 34.28,14.84 5.92,13.02 27.97,11.2 37.43,2.11 43.73,5.75 29.55,10.29 30.07,22.11 2.78,25.75 32.7,26.66 41.1,41.21 2.25,70.31 11.17,67.58 46.35,66.67 12.75,66.67 10.12,65.76 25.35,59.4 39.53,58.49 5.92,58.49 32.7,57.58 10.65,55.76 8.02,54.85 3.83,47.57 1.72,22.11 45.3,21.2 31.12,14.84 35.85,12.11 33.23,11.2 31.65,33.93 19.05,70.31 16.43,69.4 29.55,66.67 36.9,64.85 3.3,64.85 45.83,62.12 6.98,60.3 24.82,54.85 26.4,53.94 2.78,53.03 4.35,52.12 1.72,51.21 24.3,43.03 30.07,20.3 32.18,16.66 33.75,15.75 6.98,2.11 40.58,2.11 31.65,4.84 38.48,5.75 29.55,8.47 27.97,9.38 41.62,25.75 23.77,31.21 30.6,32.12 44.25,70.31 10.65,70.31 2.78,67.58 35.33,65.76 1.72,65.76 16.95,59.4 9.07,56.67 2.25,55.76 27.97,53.03 42.15,44.85 3.3,21.2 31.65,19.39 30.6,17.57 44.25,12.11 30.07,5.75 28.5,6.66 1.72,7.57 8.02,11.2 33.75,30.3 32.18,31.21 6.45,33.93 45.3,35.75 27.45,70.31 19.57,67.58 45.3,64.85 37.43,62.12 3.83,62.12 39,61.21 5.4,61.21 33.75,59.4 31.12,58.49 43.73,51.21 3.3,50.3 15.9,43.03 5.92,14.84 32.7,13.93 34.28,13.02 27.45,12.11 32.18,2.11 27.97,23.93 34.8,24.84 33.23,25.75 2.25,26.66 22.2,32.12 20.62,33.03 30.07,34.84 1.72,36.66 43.2,39.39 5.4,68.49 8.55,66.67 26.4,61.21 35.33,58.49 1.72,58.49 3.3,57.58 38.48,56.67 4.88,56.67 6.45,55.76 12.22,54.85 13.8,53.94 44.25,19.39 28.5,13.93 30.07,13.02 31.65,12.11 27.97,2.11 5.4,10.29 33.75,23.02 32.18,23.93 30.6,24.84 12.75,30.3 43.2,32.12 41.62,33.03 34.28,34.84 32.7,35.75 31.12,36.66 13.27,42.12 14.85,70.31 20.62,69.4 31.12,65.76 32.7,64.85 35.85,63.03 2.25,63.03 41.62,62.12 44.78,60.3 46.35,59.4 20.1,57.58 5.92,51.21 7.5,50.3 27.45,19.39 33.23,18.48 34.8,17.57 2.78,16.66 45.3,13.93 41.62,3.93 2.25,4.84 35.85,4.84 34.28,5.75 32.7,6.66 31.12,7.57 22.72,22.11 1.72,29.39 27.97,31.21 6.45,70.31 12.22,69.4 33.75,66.67 19.57,60.3 21.15,59.4 10.12,58.49 45.3,57.58 11.7,57.58 3.83,54.85 39,53.94 5.4,53.94 23.77,53.03 32.7,21.2 34.28,20.3 29.55,15.75 6.45,12.11 45.83,11.2 32.18,9.38 6.98,23.93 30.07,27.57 2.78,31.21 34.8,32.12 33.23,33.03 30.6,39.39 23.25,70.31 29.02,69.4 15.38,67.58 44.25,63.03 34.8,61.21 36.38,60.3 2.78,60.3 37.95,59.4 4.35,59.4 26.93,58.49 6.98,53.03 2.25,48.48 29.55,44.85 41.62,18.48 46.35,15.75 1.72,14.84 38.48,13.02 29.02,11.2 36.38,2.11 42.68,5.75 41.1,6.66 30.6,10.29 31.12,22.11 31.65,26.66 45.3,28.48 33.75,37.57 32.18,38.48 2.25,68.49 10.12,67.58 7.5,66.67 44.78,65.76 11.17,65.76 32.18,58.49 4.35,57.58 37.43,56.67 3.83,56.67 9.6,55.76 13.27,54.85 12.75,43.03 29.55,13.93 29.02,13.02 38.48,11.2 31.12,2.11 2.25,10.29 4.88,11.2 32.7,23.02 1.72,23.93 30.07,25.75 45.3,30.3 33.23,34.84 33.75,35.75 18,70.31 21.68,69.4 33.75,64.85 39,63.03 42.68,62.12 6.45,61.21 45.3,59.4 21.15,57.58 20.62,56.67 26.4,55.76 27.45,53.94 1.72,53.03 2.78,51.21 30.6,19.39 34.28,18.48 31.65,17.57 46.35,13.93 45.83,13.02 6.45,3.02 40.05,3.02 39,4.84 33.23,5.75 33.75,6.66 27.97,7.57 19.57,22.11 9.6,26.66 43.2,26.66 31.12,31.21 23.25,32.12 43.2,70.31 13.27,69.4 1.72,67.58 32.7,66.67 36.38,65.76 2.78,65.76 20.1,59.4 6.98,58.49 46.35,57.58 45.83,56.67 12.22,56.67 34.8,55.76 4.88,54.85 2.25,53.94 33.75,21.2 33.23,20.3 39,19.39 31.12,16.66 28.5,15.75 43.2,12.11 30.6,4.84 32.7,8.47 1.72,9.38 10.65,10.29 7.5,23.02 31.65,32.12 34.28,33.03 30.07,40.3 26.4,70.31 18.52,67.58 31.65,61.21 39.53,60.3 5.92,60.3 36.9,59.4 3.3,59.4 10.12,53.03 41.1,52.12 7.5,52.12 15.38,43.94 45.3,15.75 32.18,14.84 37.43,13.02 30.07,11.2 5.92,2.11 39.53,2.11 27.45,10.29 27.97,22.11 2.25,24.84 30.6,33.93 2.78,36.66 32.7,37.57 1.72,38.48 14.32,67.58 45.3,66.67 11.7,66.67 27.45,61.21 36.38,58.49 2.78,58.49 6.45,53.94 2.25,46.67 42.15,43.03 43.2,19.39 27.97,14.84 39,12.11 5.4,12.11 31.65,10.29 32.18,22.11 30.6,26.66 34.8,33.93 31.12,38.48 41.62,42.12 22.2,70.31 17.47,69.4 37.95,64.85 44.25,61.21 19.57,58.49 16.95,57.58 25.88,54.85 5.92,53.03 3.3,52.12 2.25,17.57 1.72,16.66 32.7,15.75 41.62,13.02 34.8,4.84 37.43,5.75 37.95,6.66 28.5,8.47 31.12,9.38 6.45,24.84 33.75,28.48 26.93,31.21 30.07,33.03 45.3,37.57 31.65,39.39 24.82,42.12 13.8,70.31 42.68,69.4 3.3,66.67 21.68,62.12 18.52,60.3 44.78,58.49 39,55.76 5.4,55.76 23.77,51.21 4.35,21.2 34.8,19.39 30.07,18.48 29.02,5.75 29.55,6.66 32.18,7.57 6.98,22.11 45.3,23.02 27.97,29.39 32.7,30.3 1.72,31.21 2.25,32.12 38.48,33.03 43.2,33.93 25.88,69.4 46.35,64.85 45.83,63.94 38.48,62.12 4.88,62.12 35.85,61.21 2.25,61.21 35.33,60.3 1.72,60.3 14.32,53.03 6.98,51.21 4.35,50.3 3.83,49.39 27.45,46.67 16.95,43.03 2.78,14.84 33.75,13.93 33.23,13.02 30.6,12.11 1.72,2.11 35.33,2.11 45.83,5.75 46.35,6.66 23.77,22.11 31.12,23.93 31.65,24.84 34.28,25.75 39,26.66 21.68,33.03 32.18,36.66
  pour Route2: -14.95,73.65 63.05,73.65 63.05,6.6 49.25,-7.2 -10.95,-7.2 -16.55,-1.6 -14.95,0
MUX_RESET
  Top 0.152: 28.78,47.1 26.8,49.08 26.8,51.22 26.49,51.52 25.88,51.52 U6.3 | 28.78,47.1 32.28,43.6 32.89,43.6 R5.2 | 28.78,47.1 26.8,45.12 22.07,45.12 19.18,48.02 19.18,51.67 15.52,55.33 15.52,63.87 U$1.10_1
MUX_SCL  (via drill 0.35 layers 1-64)
  Top 0.152: IC1.6 35.03,51.83 32.59,51.83 32.44,51.67 31.52,51.67 U6.22 31.37,51.67 30.61,51.67 v29.84,52.44 | R11.2 32.89,41.01 32.89,40.19 34.32,38.77 39.95,38.77 v40.21,39.02 | EXTRA.2 40.72,36.6 39.8,35.68 TOE.3 | v23.75,44.21 18.41,44.21 14.45,48.17 14.45,48.63 13.08,50 13.08,51.22 8.05,56.25 8.05,61.73 8.66,62.34 12.17,62.34 13.23,61.28 14.15,61.28 U$1.17_1
  Bottom 0.152: EXTRA.2 40.67,36.73 40.21,37.2 v40.21,39.02 40.21,39.33 33.35,46.19 33.35,48.63 29.84,52.13 | v23.75,44.21 23.75,46.64 29.23,52.13 29.84,52.13 | 29.84,52.13 v29.84,52.44
MUX_SDA  (via drill 0.35 layers 1-64)
  Top 0.152: 33.65,53.05 33.05,53.05 32.28,52.28 31.52,52.28 U6.23 | 33.65,53.05 35.03,53.05 IC1.4 | v40.82,39.79 39.14,41.46 R6.2 | v33.65,52.44 33.65,53.05 | TOE.2 42.34,8.7 42.34,35.06 43.42,36.14 EXTRA.1 | v23.75,59.6 22.22,61.12 16.89,61.12 U$1.18_1
  Bottom 0.152: EXTRA.1 42.94,37.05 40.82,39.18 v40.82,39.79 33.65,46.95 v33.65,52.44 33.65,53.81 33.2,54.26 29.08,54.26 v23.75,59.6
N$1
  Top 0.152: R7.2 25.43,9.15 25.43,6.72 U1.4
N$2
  Top 0.152: R10.2 25.43,19.67 25.43,17.38 U2.4
N$3
  Top 0.152: R8.2 25.43,30.03 25.43,27.75 U3.4
N$4
  Top 0.152: R9.2 27.86,43.14 27.86,40.85 26.64,39.63 26.64,39.18 25.88,38.42 25.43,38.42 U4.4
N$6
  Top 0.152: FUSE.C 45.47,46.25 R1.1
N$8
  Top 0.152: VCC.C 45.39,53.05 45.39,49.69 R2.1
N$9
  Top 0.152: R3.1 7.14,42.38 7.69,42.38 9.38,44.07 R4.2 9.27,44.21 9.27,47.25 7.9,48.63 U$1.2_2
OUT1
  Top 1.016: U1.6 18.06,5.43 18.05,5.45 18.05,5.6 17.4,6.25 17.08,6.25
  Top 2: 6.74,8.65 6.24,8.15 6.24,7.35 4.65,5.77 S1.P$2
  Top 2.54: 13.2,6.25 17.08,6.25
  Top 3: 6.74,8.65 6.84,8.75 7.4,8.75 | 12.8,6.65 13.2,6.25
  Top 3.5: 7.4,8.75 8.8,8.75 10.9,6.65 12.8,6.65
OUT2
  Top 1.016: 16.3,2.9 U1.8
  Top 2: 9.3,2.9 7.65,4.55 S1.P$1
  Top 3.5: 9.3,2.9 9.36,2.84 16.25,2.84 16.3,2.9
OUT3
  Top 1.016: U2.8 17.89,13.5 17,12.6 16.95,12.6
  Top 2: 9.65,13.8 7.65,15.8 S2_A.P$1
  Top 3.5: 16.95,12.6 10.85,12.6 9.65,13.8
OUT4
  Top 1.016: 16.35,16.4 17.25,16.4 17.6,16.05 U2.6
  Top 2: S2_A.P$2 5.5,16.85 5.5,17.01 6.75,18.26 6.75,18.55
  Top 2.54: 6.75,18.55 7.4,19.2
  Top 3.5: 16.35,16.4 12.35,16.4 9.25,19.5 7.7,19.5 7.4,19.2
OUT5
  Top 1.016: U3.8 17.95,23.89 17.95,23.9 17.05,23
  Top 2: 10.15,23.6 7.65,26.1 S2_B.P$1
  Top 3.5: 17.05,23 10.91,23 10.31,23.6 10.15,23.6
OUT6
  Top 1.016: U3.6 16.06,26.43 15.7,26.8
  Top 2: S2_B.P$2 5.5,27.25 5.5,27.41 6.25,28.16 6.25,29.05 6.75,29.55
  Top 3: 6.75,29.55 7.2,30
  Top 3.5: 15.7,26.8 12.75,26.8 9.55,30 7.2,30
OUT7
  Top 1.016: U4.8 18.39,34.5 17.3,33.4
  Top 2: 9.95,34.1 S3.P$1
  Top 3.5: 17.3,33.4 11.31,33.4 10.61,34.1 9.95,34.1
OUT8
  Top 1.016: U4.6 16.7,37.05 16.45,37.3
  Top 2: S3.P$2 4.65,36.77 6.63,38.75 6.7,38.75
  Top 2.54: 6.7,38.75 7.05,39.1
  Top 3: 7.05,39.1 7.4,39.45 9.05,39.45
  Top 3.5: 9.05,39.45 10.7,37.8 15.05,37.8 15.55,37.3 16.45,37.3
S0_A  (via drill 0.35 layers 1-64)
  Top 0.254: U4.3 26.84,37.04 27.4,37.6 v27.4,39.25
  Bottom 0.254: v27.4,39.25 26.3,40.35 23.95,40.35 21.9,42.4 21.9,60.3 18.33,63.87 U$1.9_1
S0_B  (via drill 0.35 layers 1-64)
  Top 0.254: U4.2 27.41,35.77 28.35,36.7 v28.35,40.4
  Bottom 0.254: v28.35,40.4 27.8,40.95 24.25,40.95 22.6,42.6 22.6,64.55 21.35,65.8 13.8,65.8 12.95,64.95 U$1.11_1
S0_SCL  (via drill 0.35 layers 1-64)
  Top 0.152: v29.84,50.61 30.15,50.3 31.37,50.3 U6.20
  Bottom 0.152: v29.84,50.61 29.23,50 29.23,49.39 37.46,41.16 37.46,32.93 40.71,29.68 S0_ENC.2
S0_SDA  (via drill 0.35 layers 1-64)
  Top 0.152: v29.84,49.69 31.37,49.69 U6.19
  Bottom 0.152: v29.84,49.69 29.84,49.23 39.6,39.48 39.6,33.39 43.19,29.8 S0_ENC.1
S1_SCL  (via drill 0.35 layers 1-64)
  Top 0.152: v29.54,51.52 29.23,51.22 29.23,49.39 29.69,48.93 31.37,48.93 U6.18
  Bottom 0.152: v29.54,51.52 29.54,51.22 28.93,50.61 28.93,49.23 37.16,41.01 37.16,26.22 40.74,22.64 S1_ENC.2
S1_SDA
  Top 0.152: U6.17 31.37,48.32 29.84,48.32 28.93,49.23 28.93,52.44 31.22,54.72 43.1,54.72 44.63,53.2 44.63,23.33 43.94,22.64 S1_ENC.1
S1A_A
  Top 0.152: U2.3 25.43,16.16 25.88,16.16 29.08,19.36 29.08,42.38 28.78,42.68 28.78,44.05 28.02,44.82 20.4,44.82 16.59,48.63 16.59,49.69 15.37,50.91 15.37,55.03 9.27,61.12 U$1.15_1
S1A_B  (via drill 0.35 layers 1-64)
  Top 0.152: v29.08,18.15 25.73,14.79 25.43,14.79 U2.2
  Bottom 0.152: v29.08,18.15 29.08,31.1 23.9,36.28 23.9,39.79 19.02,44.66 19.02,53.35 11.71,60.67 11.71,61.12 U$1.16_1
S1B_A  (via drill 0.35 layers 1-64)
  Top 0.254: U3.3 28.38,26.43 28.4,26.45 v28.38,26.47
  Bottom 0.254: v28.38,26.47 28.38,27.32 26.4,29.3 22.5,29.3 19.85,31.95 19.85,42.7 16.76,45.79 U$1.19_3
S1B_B  (via drill 0.35 layers 1-64)
  Top 0.254: v27.55,25.1 25.39,25.1 U3.2
  Bottom 0.254: U$1.20_3 14.22,46.78 19.2,41.8 19.2,31.25 21.85,28.6 26.35,28.6 27.55,27.4 v27.55,25.1
S2_A  (via drill 0.35 layers 1-64)
  Top 0.254: v27.9,5.45 25.34,5.45 U1.3
  Bottom 0.254: U$1.21_3 11.68,16.07 14.55,13.2 20.15,13.2 v27.9,5.45
S2_B  (via drill 0.35 layers 1-64)
  Top 0.254: U1.2 27.88,4.17 27.9,4.15 v27.93,4.17
  Bottom 0.254: v27.93,4.17 19.55,12.55 14.1,12.55 10.9,15.75 10.9,45.1 9.1,46.9 9.1,51.05 U$1.22_3
S2_SCL  (via drill 0.35 layers 1-64)
  Top 0.152: v29.84,47.41 30,47.56 31.37,47.56 U6.16 | v26.03,39.48 v26.03,43.6
  Bottom 0.152: v26.03,43.6 v29.84,47.41 | v26.03,39.48 26.03,35.11 37.46,23.68 37.46,18.91 40.77,15.61 S2_ENC.2
S2_SDA
  Top 0.152: U6.15 31.37,46.95 30.3,46.95 30.15,46.8 29.54,46.8 28.62,47.71 28.62,52.59 33.81,57.77 43.26,57.77 46.3,54.72 46.3,17.99 43.92,15.61 S2_ENC.1
TOE_GPIO
  Bottom 0.152: TOE.1 43.98,8.1 39.45,3.52 26.49,3.52 17.96,12.05 13.99,12.05 5.77,20.28 5.77,48.32 5.46,48.63 U$1.1_2

## Text on the board
tPlace: June 2026 Leg Breakout / Hex 3, V3.2
tNames: CAN | + | I2C | S0 | S1_A | S1_B | S2